# EAGLE board SAME54-board-1.0.3 (EAGLE 9.6.2)
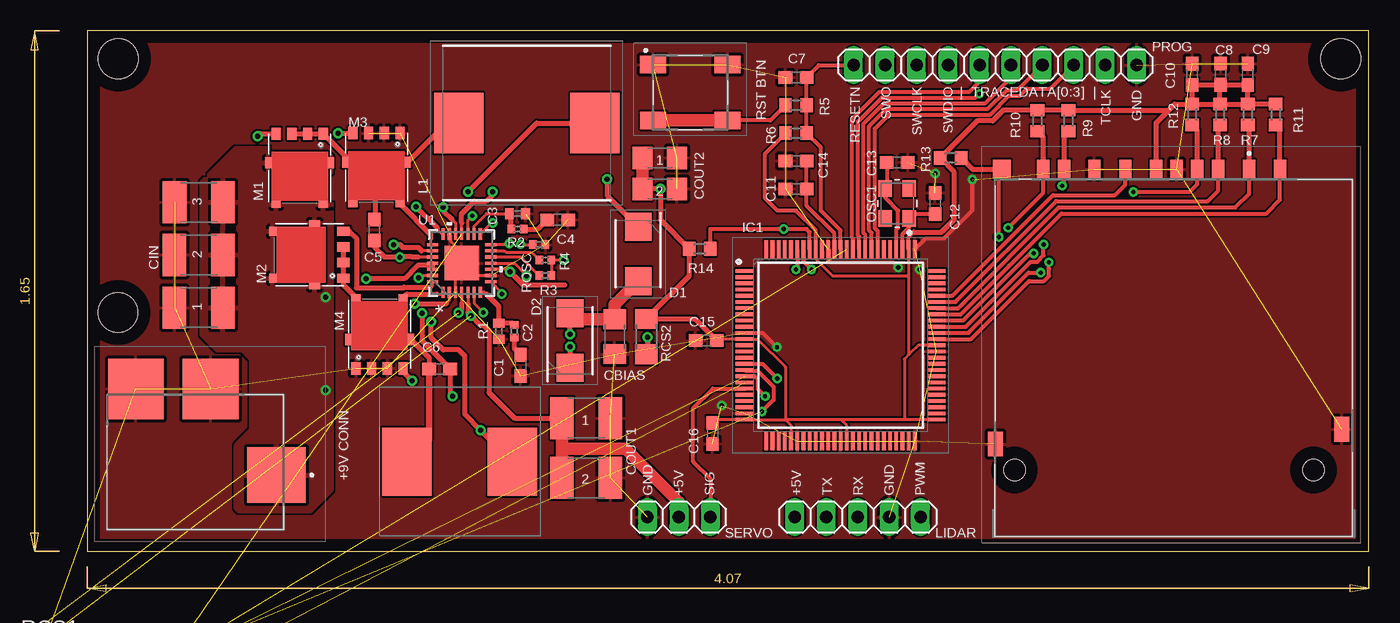
[diagram p0: board, top side]
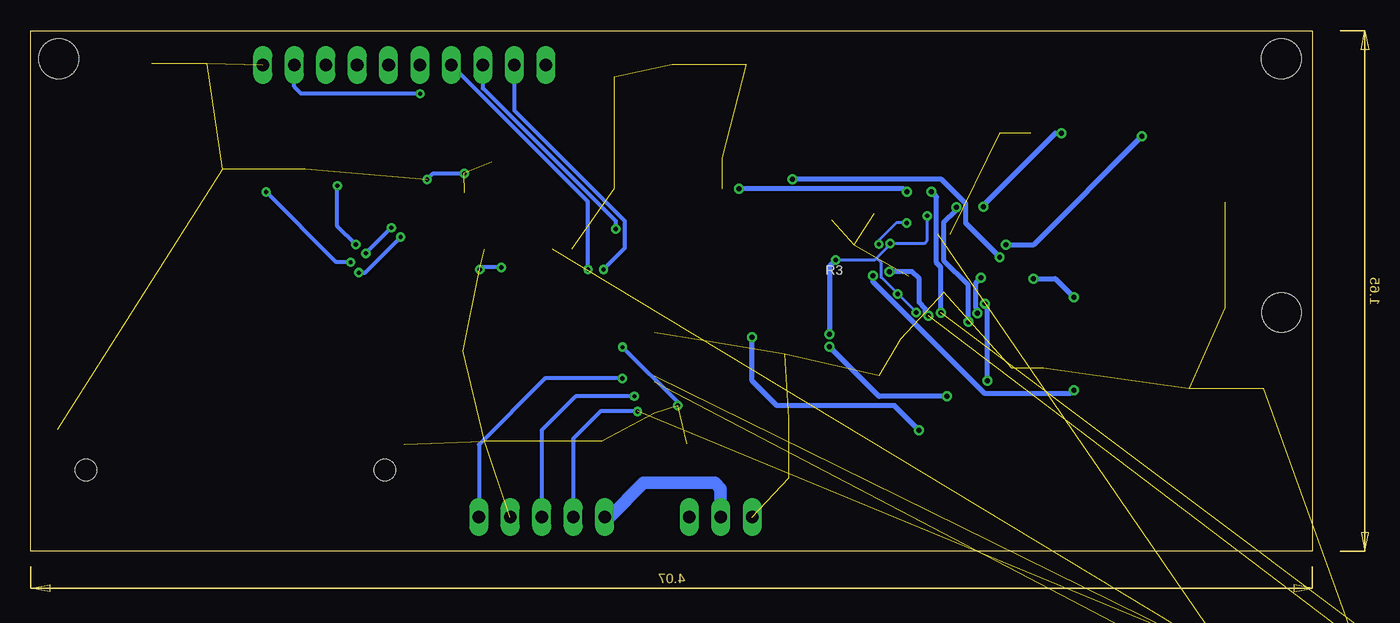
[diagram p1: board, bottom side, seen from below]

Size 103.5 x 42 mm. Coordinates in mm from the lower left corner, seen from the top.
Outline: 0,0 103.5,0 103.5,42 0,42 0,0
Copper layers (1*16): Top 0.035mm / dielectric 1.5mm / Bottom 0.035mm
Design rules "default": minimum track width 6mil, minimum drill 0.35mm, track to track 6mil, track to pad 6mil, pad to pad 6mil, via to via 6mil, smd to smd 6mil, copper to edge 40mil, drill to drill 6mil, minimum pad ring 10mil, minimum via ring 8mil, stop-mask expansion 4mil, vias tented up to drill 0mil, thermal gap 10mil
Holes 3.2 mm at 2.48,19.27 2.5,39.75 101.25,39.75

## Footprints (pad centres in the part's own frame; a part is rotated, then mirrored left to right if it is on the bottom)
C0603 = smd 1.1 x 1: 1 -0.85,0; 2 0.85,0
C0402 = smd 0.7 x 0.9: 1 -0.65,0; 2 0.65,0
C1206 = smd 1.6 x 1.8: 1 -1.4,0; 2 1.4,0
C1812 = smd 1.9 x 3.4: 1 -1.95,0; 2 1.95,0
DIOM5436X247N = smd 2.25 x 2.15: 1 -2.2,0; 2 2.2,0
QFP50P1600X1600X120-100N = smd 1.475 x 0.3: 1 -7.738,6; 2 -7.738,5.5; 3 -7.738,5; 4 -7.738,4.5; 5 -7.738,4; 6 -7.738,3.5; 7 -7.738,3; 8 -7.738,2.5; 9 -7.738,2; 10 -7.738,1.5; 11 -7.738,1; 12 -7.738,0.5; 13 -7.738,0; 14 -7.738,-0.5; 15 -7.738,-1; 16 -7.738,-1.5; 17 -7.738,-2; 18 -7.738,-2.5; 19 -7.738,-3; 20 -7.738,-3.5; 21 -7.738,-4; 22 -7.738,-4.5; 23 -7.738,-5; 24 -7.738,-5.5; 25 -7.738,-6; 51 7.738,-6; 52 7.738,-5.5; 53 7.738,-5; 54 7.738,-4.5; 55 7.738,-4; 56 7.738,-3.5; 57 7.738,-3; 58 7.738,-2.5; 59 7.738,-2; 60 7.738,-1.5; 61 7.738,-1; 62 7.738,-0.5; 63 7.738,0; 64 7.738,0.5; 65 7.738,1; 66 7.738,1.5; 67 7.738,2; 68 7.738,2.5; 69 7.738,3; 70 7.738,3.5; 71 7.738,4; 72 7.738,4.5; 73 7.738,5; 74 7.738,5.5; 75 7.738,6 | smd 0.3 x 1.475: 26 -6,-7.738; 27 -5.5,-7.738; 28 -5,-7.738; 29 -4.5,-7.738; 30 -4,-7.738; 31 -3.5,-7.738; 32 -3,-7.738; 33 -2.5,-7.738; 34 -2,-7.738; 35 -1.5,-7.738; 36 -1,-7.738; 37 -0.5,-7.738; 38 0,-7.738; 39 0.5,-7.738; 40 1,-7.738; 41 1.5,-7.738; 42 2,-7.738; 43 2.5,-7.738; 44 3,-7.738; 45 3.5,-7.738; 46 4,-7.738; 47 4.5,-7.738; 48 5,-7.738; 49 5.5,-7.738; 50 6,-7.738; 76 6,7.738; 77 5.5,7.738; 78 5,7.738; 79 4.5,7.738; 80 4,7.738; 81 3.5,7.738; 82 3,7.738; 83 2.5,7.738; 84 2,7.738; 85 1.5,7.738; 86 1,7.738; 87 0.5,7.738; 88 0,7.738; 89 -0.5,7.738; 90 -1,7.738; 91 -1.5,7.738; 92 -2,7.738; 93 -2.5,7.738; 94 -3,7.738; 95 -3.5,7.738; 96 -4,7.738; 97 -4.5,7.738; 98 -5,7.738; 99 -5.5,7.738; 100 -6,7.738
PJ070BHSMTTR = smd 4.7 x 4.5: 1 -5.368,2.5 | smd 4.5 x 4.9: 2 -0.067,-4.45; 3 5.982,-4.45
INDPM135125X350N = smd 4 x 4.9: 1 -5.5,0; 2 5.5,0
MSS1260 = smd 5.5 x 4: P$1 0,8.5; P$2 0,0
CHIPLED_0603 = smd 0.8 x 0.8: A 0,-0.75; C 0,0.75
1X05 = drill 1.016 long: 1 -5.08,0; 2 -2.54,0; 3 0,0; 4 2.54,0; 5 5.08,0
DFN5_SO-8FL = smd 0.495 x 0.905: D1 -2.527,2.342; D4 2.527,2.342 | smd 0.75 x 0.575: D2 -1.905,5.707; D3 1.905,5.707 | smd 0.75 x 1: G 1.905,0; S1 -1.905,0; S2 -0.635,0; S3 0.635,0
OSCCC320X250X90N = smd 1.333 x 1.083: 1 -1.2,-0.975; 2 1.2,-0.975; 3 1.2,0.975; 4 -1.2,0.975
1X10 = drill 1.016 long: 1 -11.43,0; 2 -8.89,0; 3 -6.35,0; 4 -3.81,0; 5 -1.27,0; 6 1.27,0; 7 3.81,0; 8 6.35,0; 9 8.89,0; 10 11.43,0
R0402 = smd 0.6 x 0.7: 1 -0.5,0; 2 0.5,0
R0603 = smd 1 x 1.1: 1 -0.85,0; 2 0.85,0
R1206 = smd 1.6 x 1.803: 1 -1.422,0; 2 1.422,0
LL3301BF065QJ = smd 2.1 x 1.4: 1 -3,2.25; 2 3,2.25; 3 -3,-2.25; 4 3,-2.25
GSD09002SEU = smd 1.5 x 1: 1 -14.183,6.3; 2 -14.183,3.8; 3 -14.183,0.45; 4 -14.183,-1.2; 5 -14.183,-3.7; 6 -14.183,-6.2; 7 -14.183,-8.63; 8 -14.183,-10.33; 9 -14.183,8.8; CD1 -14.183,2.1 | smd 2 x 1.2: G1 6.827,13.8; G2 8.027,-14.2 | smd 1.5 x 1.45: WP1 -14.183,-13.68 | hole 1.7: 10.127,11.5; 10.127,-12.65
1X03 = drill 1.016 long: 1 -2.54,0; 2 0,0; 3 2.54,0
21-100130_MXM = smd 0.914 x 0.254: 1 -2.349,1.5; 2 -2.349,1; 3 -2.349,0.5; 4 -2.349,0; 5 -2.349,-0.5; 6 -2.349,-1; 7 -2.349,-1.5; 15 2.349,-1.5; 16 2.349,-1; 17 2.349,-0.5; 18 2.349,0; 19 2.349,0.5; 20 2.349,1; 21 2.349,1.5 | smd 0.254 x 0.914: 8 -1.5,-2.349; 9 -1,-2.349; 10 -0.5,-2.349; 11 0,-2.349; 12 0.5,-2.349; 13 1,-2.349; 14 1.5,-2.349; 22 1.5,2.349; 23 1,2.349; 24 0.5,2.349; 25 0,2.349; 26 -0.5,2.349; 27 -1,2.349; 28 -1.5,2.349 | smd 2.794 x 2.794: 29 0,0

## Placement (x,y rotation side)
C1  4.7n  [C0603]  35,15 270 top
C2  4.7p  [C0402]  33.25,17.75 270 top
C3  4.7p  [C0402]  34.75,27.25 0 top
C4  4.7n  [C0603]  38,26.75 0 top
C5  100n  [C0603]  23.2,25.94 270 top
C6  100n  [C0603]  28.46,14.7 0 top
C7  100n  [C0603]  57.25,38.25 180 top
C8  100n  [C0603]  91.55,38.51 90 top
C9  10u  [C0603]  93.75,38.5 90 top
C10  100n  [C0603]  89.25,38.5 90 top
C11  100n  [C0603]  57.25,29.25 180 top
C12  8p  [C0603]  68.49,28.07 90 top
C13  8p  [C0603]  65.43,31.38 0 top
C14  4.7u  [C0603]  57.25,31.5 180 top
C15  100n  [C0603]  50,17 180 top
C16  100n  [C0603]  50.5,9.5 270 top
CBIAS  6.8u  [C1206]  42.6,17.31 270 top
CIN_1  33u  [C1812]  9.01,28.16 180 top
CIN_2  33u  [C1812]  9,23.91 180 top
CIN_3  33u  [C1812]  9,19.66 180 top
COUT1_1  33u  [C1812]  40.3,10.74 0 top
COUT1_2  33u  [C1812]  40.3,5.91 0 top
COUT2_1  22u  [C1206]  46.25,31.75 0 top
COUT2_2  22u  [C1206]  46.25,29.25 0 top
D1  MBRS140T3G  [DIOM5436X247N]  44.5,24 270 top
D2  MBRS140T3G  [DIOM5436X247N]  39,17 90 top
IC1  ATSAME54N20A-AUT  [QFP50P1600X1600X120-100N]  60.85,16.62 0 top
J1  PJ-070BH-SMT-TR  [PJ070BHSMTTR]  9.91,8.64 180 top
L1  SRP1238A-3R3M  [INDPM135125X350N]  35.5,34.56 0 top
L2  MSS1260-682MLB  [MSS1260]  34.33,7.22 90 top
LED_RX  [CHIPLED_0603]  -16.25,-20.75 0 top  (outside the outline)
LED_STATUS  [CHIPLED_0603]  -11.25,-20.75 0 top  (outside the outline)
LED_TX  [CHIPLED_0603]  -21.25,-20.75 0 top  (outside the outline)
LIDAR  [1X05]  62.24,2.75 0 top
M1  NVMFS5C468NL  [DFN5_SO-8FL]  17.16,33.7 180 top
M2  NVMFS5C468NL  [DFN5_SO-8FL]  20.7,23.93 90 top
M3  NVMFS5C468NL  [DFN5_SO-8FL]  23.36,33.75 180 top
M4  NVMFS5C468NL  [DFN5_SO-8FL]  23.61,14.75 0 top
OSC1  CX3225CA12000D0KPSC1CX3225CA  [OSCCC320X250X90N]  65.43,28.07 90 top
PROG  [1X10]  73.34,39.25 0 top
R1  10.5k  [R0402]  34.5,17.75 90 top
R2  10.2k  [R0402]  34.75,26 180 top
R3  51k  [R0402]  37,22.25 180 top
R4  51k  [R0402]  37,23.5 180 top
R5  330  [R0603]  57.25,36 0 top
R6  10k  [R0603]  57.25,33.75 180 top
R7  100k  [R0603]  93.75,35.25 90 top
R8  10k  [R0603]  91.5,35.25 90 top
R9  100k  [R0603]  79.25,34.75 90 top
R10  100k  [R0603]  76.75,34.75 90 top
R11  100k  [R0603]  96,35.25 90 top
R12  10k  [R0603]  89.25,35.25 90 top
R13  10k  [R0603]  69.75,31.75 180 top
R14  1k  [R0603]  49.47,24.41 180 top
R15  10k  [R0603]  -7.25,-20.25 0 top  (outside the outline)
R16  [R0603]  -22,-25.25 0 top  (outside the outline)
R17  [R0603]  -22,-28.75 0 top  (outside the outline)
R18  [R0603]  -22,-32.25 0 top  (outside the outline)
RCS1  10m  [R0603]  -4.75,-7.5 0 top  (outside the outline)
RCS2  20m  [R1206]  45.15,17.32 90 top
RESET_BTN  LL3301BF065QJ  [LL3301BF065QJ]  48.71,37.03 0 top
ROSC  46.4k  [R0402]  36.5,24.75 180 top
SD_CARD_CONN  GSD09002SEU  [GSD09002SEU]  87.55,16.67 270 top
SERVO  [1X03]  47.79,2.75 180 top
START_BTN  LL3301BF065QJ  [LL3301BF065QJ]  -1.5,-14 0 top  (outside the outline)
U1  MAX20034ATIS/VY+  [21-100130_MXM]  30.25,23.25 90 top

## Library data of the parts
C1-C16 CBIAS CIN_1-CIN_3 COUT1_1 COUT1_2 COUT2_1 COUT2_2 = rcl; SPICEPREFIX: C
D1 D2 = LAMS_lib; DESCRIPTION: ON SEMICONDUCTOR - MBRS140T3G - Schottky Rectifier, 40 V, 1 A, Single, DO-214AA (SMB), 2 Pins, 600 mV; HEIGHT: 2.47mm; MANUFACTURER_NAME: ON Semiconductor; MANUFACTURER_PART_NUMBER: MBRS140T3G; MOUSER_PART_NUMBER: 863-MBRS140T3G; MOUSER_PRICE-STOCK: https://www.mouser.co.uk/ProductDetail/ON-Semiconductor/MBRS140T3G?qs=3JMERSakebr7iYT6dCJz%252BA%3D%3D
IC1 = LAMS_lib; DESCRIPTION: ARM Microcontrollers - MCU 120MHZ 1024KB FLASH 100 TQFP PKG IN 85C; HEIGHT: 1.2mm; MANUFACTURER_NAME: Microchip; MANUFACTURER_PART_NUMBER: ATSAME54N20A-AUT; MOUSER_PART_NUMBER: 556-ATSAME54N20AAUT; MOUSER_PRICE-STOCK: https://www.mouser.co.uk/ProductDetail/Microchip-Technology/ATSAME54N20A-AUT?qs=HXFqYaX1Q2wziE5NRG3J9w%3D%3D
J1 = LAMS_lib; DESCRIPTION: DC Power Connectors powerjack, 2.5x5.5mm, vertical, SMT, highcurrent, 1switch, T/Rpackaging; HEIGHT: 14mm; MANUFACTURER_NAME: CUI Devices; MANUFACTURER_PART_NUMBER: PJ-070BH-SMT-TR; MOUSER_PART_NUMBER: 490-PJ-070BH-SMT-TR; MOUSER_PRICE-STOCK: https://www.mouser.co.uk/ProductDetail/CUI-Devices/PJ-070BH-SMT-TR?qs=WyjlAZoYn52QG%252BaAz33LnQ%3D%3D
L1 = LAMS_lib; DESCRIPTION: Bourns SRP1238A Series Shielded Wire-wound SMD Inductor with a Carbonyl Powder Core, 3.3 uH +/-20% 12A Idc; HEIGHT: 3.5mm; MANUFACTURER_NAME: Bourns; MANUFACTURER_PART_NUMBER: SRP1238A-3R3M; MOUSER_PART_NUMBER: 652-SRP1238A-3R3M; MOUSER_PRICE-STOCK: https://www.mouser.co.uk/ProductDetail/Bourns/SRP1238A-3R3M?qs=7z%252BmIopC6%2FIr03myiJYD%2FQ%3D%3D
L2 M1-M4 OSC1 = LAMS_lib
LED_RX LED_STATUS LED_TX = led
LIDAR PROG SERVO = pinhead
R1-R18 RCS1 RCS2 ROSC = rcl; SPICEPREFIX: R
RESET_BTN START_BTN = LAMS_lib; DESCRIPTION: Pushbutton Switches 50mA 12VDC F065 9.5mm J-Lead; HEIGHT: 9.8mm; MANUFACTURER_NAME: E-Switch; MANUFACTURER_PART_NUMBER: LL3301BF065QJ; MOUSER_PART_NUMBER: 612-LL3301BF065QJ; MOUSER_PRICE-STOCK: https://www.mouser.co.uk/ProductDetail/E-Switch/LL3301BF065QJ?qs=QtyuwXswaQgf5j8qoJZz7w%3D%3D
SD_CARD_CONN = LAMS_lib; DESCRIPTION: Memory Card Connectors SD, 9 pos, 15U; HEIGHT: 2.75mm; MANUFACTURER_NAME: Amphenol; MANUFACTURER_PART_NUMBER: GSD09002SEU; MOUSER_PART_NUMBER: 523-GSD09002SEU; MOUSER_PRICE-STOCK: https://www.mouser.co.uk/ProductDetail/Amphenol-Commercial-Products/GSD09002SEU?qs=J%2Fw1naXNy4LtG6w9y13mdQ%3D%3D
U1 = LAMS_lib; MANUFACTURER_PART_NUMBER: MAX20034ATISVY+; VENDOR: Maxim Integrated Products

## Nets
+3V3: C8.1 C9.1 C10.1 C15.1 C16.1 COUT2_1.1 COUT2_2.1 IC1.12 IC1.25 IC1.30 IC1.39 IC1.51 IC1.63 IC1.77 IC1.92 R6.2 R7.2 R8.2 R9.2 R10.2 R11.2 R12.2 R13.2 R14.2 R17.2 R18.2 RCS2.2 SD_CARD_CONN.4 START_BTN.3 START_BTN.4 U1.18
+5V: COUT1_1.1 COUT1_2.1 LIDAR.1 RCS1.2 SERVO.2 U1.5 U1.10
+9V: CIN_1.1 CIN_2.1 CIN_3.1 J1.1 M1.D1 M1.D2 M1.D3 M1.D4 M2.D1 M2.D2 M2.D3 M2.D4 U1.11 U1.25 U1.26
BIAS: CBIAS.1 D1.2 D2.2 R3.1 R4.1 U1.6 U1.8 U1.14 U1.17
BST1: C6.2 D2.1 U1.27
BST2: C5.2 D1.1 U1.24
COMP1: C2.1 R1.2 U1.7
COMP2: C3.1 R2.2 U1.16
CS1: L1.2 RCS1.1 U1.4
CS2: L2.P$2 RCS2.1 U1.19
DH1: M2.G U1.28
DH2: M1.G U1.23
DL1: M4.G U1.2
DL2: M3.G U1.21
FOSC: ROSC.2 U1.15
GND: C1.2 C2.2 C3.2 C4.2 C7.2 C8.2 C9.2 C10.2 C11.2 C12.2 C13.2 C14.2 C15.2 C16.2 CBIAS.2 CIN_1.2 CIN_2.2 CIN_3.2 COUT1_1.2 COUT1_2.2 COUT2_1.2 COUT2_2.2 IC1.11 IC1.24 IC1.31 IC1.38 IC1.50 IC1.62 IC1.76 IC1.90 J1.2 J1.3 LED_STATUS.C LIDAR.4 M3.S1 M3.S2 M3.S3 M4.S1 M4.S2 M4.S3 PROG.10 R15.1 RESET_BTN.1 RESET_BTN.2 ROSC.1 SD_CARD_CONN.3 SD_CARD_CONN.6 SD_CARD_CONN.G1 SD_CARD_CONN.G2 SERVO.3 U1.3 U1.9 U1.20 U1.29
LED_STATUS: IC1.19 R16.2
LIDAR_PWM: IC1.16 LIDAR.5
LIDAR_RX: IC1.18 LED_RX.C LIDAR.3
LIDAR_TX: IC1.17 LED_TX.C LIDAR.2
LX1: C6.1 L2.P$1 M2.S1 M2.S2 M2.S3 M4.D1 M4.D2 M4.D3 M4.D4 U1.1
LX2: C5.1 L1.1 M1.S1 M1.S2 M1.S3 M3.D1 M3.D2 M3.D3 M3.D4 U1.22
N$1: C1.1 R1.1
N$2: LED_STATUS.A R16.1
N$3: C4.1 R2.1
N$4: R5.1 RESET_BTN.3 RESET_BTN.4
N$8: LED_RX.A R17.1
N$9: LED_TX.A R18.1
PGOOD1: R3.2 U1.12
PGOOD2: R4.2 U1.13
RESETN: C7.1 IC1.88 PROG.1 R5.2 R6.1
SDCD: IC1.64 R12.1 SD_CARD_CONN.CD1
SDCK: IC1.71 SD_CARD_CONN.5
SDCMD: IC1.70 R8.1 SD_CARD_CONN.2
SDDAT0: IC1.66 R9.1 SD_CARD_CONN.7
SDDAT1: IC1.67 R10.1 SD_CARD_CONN.8
SDDAT2: IC1.68 R11.1 SD_CARD_CONN.9
SDDAT3: IC1.69 R7.1 SD_CARD_CONN.1
SDWP: IC1.65 R13.1 SD_CARD_CONN.WP1
SERVO_PWM: IC1.20 SERVO.1
START_BTN: IC1.87 R15.2 START_BTN.1 START_BTN.2
SWDCLK: IC1.93 PROG.3 R14.1
SWDIO: IC1.94 PROG.4
SWO: IC1.95 PROG.2
TRACECLK: IC1.85 PROG.9
TRACEDATA[0]: IC1.86 PROG.5
TRACEDATA[1]: IC1.84 PROG.6
TRACEDATA[2]: IC1.83 PROG.7
TRACEDATA[3]: IC1.82 PROG.8
VDDCORE: C11.1 C14.1 IC1.89
XIN1: C12.1 IC1.78 OSC1.1
XOUT1: C13.1 IC1.79 OSC1.3

## Tracks (layer width: path | path; a pad name or v marks a point on that pad's centre or on a via)
+3V3  (via drill 0.4 pad 0.8)  (4 unrouted)
  Top 0.254: U1.18 30.25,26.5 | C16.1 50.77,10.62 IC1.25 56.38,10.62 | C15.1 50.97,17.12 IC1.12 54.13,17.12 56.38,14.87 56.38,10.62 | IC1.30 56.85,10.15 56.38,10.62 | IC1.39 61.35,10.15 60.88,10.62 | 60.88,10.62 56.38,10.62 | IC1.51 66,10.62 | 66,10.62 60.88,10.62 | IC1.63 67.12,16.62 66.38,15.88 | 66,10.62 66,15.5 66.38,15.88 | IC1.77 66.35,22.25 | 66.35,22.25 66.35,15.9 66.38,15.88 | 66.35,22.25 60.17,22.25 58.85,23.57 IC1.92
  Top 0.305: IC1.92 58.85,25.9 57.25,27.5 55.75,27.5 54.75,28.5 54.75,32.1 R6.2 | IC1.77 66.35,25.35 66.75,25.75
  Top 0.406: 30.25,26.5 30.25,27.25 31.25,28.25 32.25,28.25 32.75,28.75 v32.75,29 | COUT2_2.1 v46.29,29.25 46.29,26.74 R14.2 48.62,22.21 RCS2.2 49.11,18.74 C15.1 | R12.2 R8.2 | R8.2 R7.2 | R11.2 R7.2 | R7.2 C9.1 C8.1 91.5,37.61 | R8.2 91.5,37.61 | R12.2 C10.1 91.46,37.65 91.5,37.61 | SD_CARD_CONN.4 86.35,34.6 87.35,35.6 | R12.2 87.85,36.1 87.35,35.6 | 87.35,35.6 R9.2 R10.2 74.01,35.6 73.15,34.74 71.89,34.74 R13.2 70,30.65 70,26.75 69,25.75 66.75,25.75
  Top 1.016: COUT2_2.1 COUT2_1.1
  Bottom 0.406: v32.75,29 33,29.25 v46.29,29.25
+5V  (via drill 0.4 pad 0.8)  (1 unrouted)
  Top 0.254: U1.5 30.75,20 | v34.13,22.57 33.95,22.75 U1.10
  Top 0.406: 30.75,20 30.75,19.25 v31,19 31.75,18.25 32,18.25 32.44,17.81 32.44,12.81 34.51,10.74 COUT1_1.1 | v34.13,22.57 34.74,21.96 34.74,21.94 35.19,21.49 38.57,21.49
  Top 1.016: COUT1_2.1 38.35,8.25 | 38.35,8.25 COUT1_1.1 | SERVO.2 47.79,3.96 43.48,8.27 41.03,8.27 41.01,8.25 38.35,8.25
  Bottom 0.406: v31,19 31.25,19.25 31.25,19.57 31.75,20.08 31.75,22 32.32,22.57 v34.13,22.57
  Bottom 1.016: SERVO.2 47.79,5.04 48.25,5.5 54,5.5 56.75,2.75 LIDAR.1
+9V  (via drill 0.4 pad 0.8)
  Top 0.254: v35.5,22.25 34.5,23.25 U1.11
  Top 0.305: U1.26 27.9,23.08 U1.25
  Top 0.406: M1.D2 19.07,30.73 M1.D1 | v22.51,22.01 25.62,22.01 26.69,23.08 27.9,23.08
  Bottom 0.406: v22.51,22.01 20.76,22.01 v19.25,20.5 | v35.5,22.25 35.5,21.75 26.5,12.75 19.5,12.75 v19.25,13
  pour Top: 9.25,29.75 9.25,17.5 10.5,16.25 12.5,16.25 13.25,15.5 13.25,9.75 12,8.5 12,3.5 12.25,3.25 18,3.25 19.75,5 19.75,31.75 19,32.5 12,32.5
BIAS  (via drill 0.35 pad 0.5, 0.4 pad 0.8)
  Top 0.254: U1.17 30.75,26.71 v31.11,27.07 | v34.09,24.84 34,24.75 U1.14 | v38.5,23.5 R4.1 R3.1 | U1.8 33.48,20.87 v33.48,20.77 | U1.6 31.25,20 v31.98,19.27
  Top 0.406: v39,17.5 D2.2
  Top 1.016: D2.2 39.49,18.71 CBIAS.1 42.6,19.9 D1.2
  Bottom 0.254: v31.11,27.07 31.11,25.06 31.34,24.84 v34.09,24.84 34.34,24.58 34.34,24.51 35.19,23.66 | v31.98,19.27 v33.48,20.77 34.82,22.11 34.82,23.28 35.19,23.66 | 35.19,23.66 35.35,23.5 v38.5,23.5
  Bottom 0.406: v38.5,23.5 39,23 v39,17.5
BST1  (via drill 0.4 pad 0.8)
  Top 0.254: U1.27 26.93,22.25 v26.75,22.07
  Top 0.406: v27.03,19.22 27.03,16.99 C6.2 29.31,12.69 v29.5,12.5 | v39,16.5 D2.1
  Bottom 0.406: v27.03,19.22 27.03,19.5 27.2,19.68 27.2,21.61 v26.75,22.07 | v39,16.5 35,12.5 v29.5,12.5
BST2  (via drill 0.4 pad 0.8)
  Top 0.254: 26.75,23.75 U1.24
  Top 0.406: C5.2 23.2,24.55 24,23.75 v25.26,23.75 | 26.75,23.75 26.25,23.75 v25.26,23.75 | v25.26,23.75 v25.25,23.74 | v42,30.01 42,28.7 D1.1
  Bottom 0.406: v25.25,23.74 27.99,26.48 27.99,28.06 29.94,30.01 v42,30.01
COMP1
  Top 0.254: 32.25,20.75 32.1,20.9 U1.7
  Top 0.406: R1.2 34.35,18.4 C2.1 33.25,19.75 32.25,20.75
COMP2
  Top 0.254: U1.16 31.25,26.25 32.25,27.25 C3.1
  Top 0.406: R2.2 34.25,27.1 C3.1
CS1  (via drill 0.4 pad 0.8)  (1 unrouted)
  Top 0.254: U1.4 30.25,20
  Top 0.406: 30.25,20 30.25,19.5 v30,19.25 | v30.75,29 36.31,34.56 L1.2
  Top 1.016: 40.85,34.41 L1.2
  Bottom 0.406: v30,19.25 30,22.92 30.35,23.27 30.35,28.6 v30.75,29
CS2  (via drill 0.4 pad 0.8)
  Top 0.254: 29.5,26.75 29.75,26.5 U1.19
  Top 0.406: v27.79,18.5 27.79,17.21 28.75,16.25 30,16.25 30.5,15.75 30.5,11.05 v31.77,9.78 L2.P$2 | v28.75,27.75 28.75,27.5 29.5,26.75 | v45.25,17.25 45.25,16 RCS2.1
  Bottom 0.406: v27.79,18.5 27.79,21.5 29.79,23.5 29.79,26.54 28.75,27.58 v28.75,27.75 | v31.77,9.78 33.77,11.78 43.27,11.78 45.25,13.75 v45.25,17.25
DH1
  Top 0.254: 27.75,21.31 27.9,21.46 U1.28
  Top 0.406: M2.G 21.16,25.84 21.75,25.25 21.75,21.25 25.52,21.25 25.58,21.31 27.75,21.31
DH2  (via drill 0.4 pad 0.8)
  Top 0.254: U1.23 27,24.25
  Top 0.406: 27,24.25 26.75,24.5 25.5,24.5 25.25,24.75 v24.75,24.75 | v13.75,33.5 13.95,33.7 M1.G
  Bottom 0.406: v24.75,24.75 22.5,24.75 v13.75,33.5
DL1  (via drill 0.4 pad 0.8)
  Top 0.254: 29,20 29.25,20.25 U1.2
  Top 0.406: M4.G 25.52,14.48 v26.25,13.75 | v26.45,19.99 28.99,19.99 29,20
  Bottom 0.406: v26.25,13.75 26.25,19.8 v26.45,19.99
DL2  (via drill 0.4 pad 0.8)
  Top 0.254: 28.25,26 28.65,25.6 U1.21
  Top 0.406: v20.25,33.75 M3.G | v26.57,27.82 28.25,26.13 28.25,26
  Bottom 0.406: v26.57,27.82 26.43,27.95 26.43,28.07 20.75,33.75 v20.25,33.75
FOSC  (via drill 0.35 pad 0.5)
  Top 0.254: U1.15 32.65,26.5 v32.75,26.5 | v35,24.78 35.03,24.75 ROSC.2
  Bottom 0.254: v35,24.78 v34.99,24.79 34.99,25.11 33.6,26.5 v32.75,26.5
GND  (via drill 0.35 pad 0.6)  (50 unrouted)
  Top 0.254: U1.3 29.75,22.75 U1.29 | U1.9 31.25,22.25 U1.29 | U1.20 29.34,25.51 29.34,25.03 30.25,24.12 U1.29
  Top 0.305: IC1.76 67.73,25.24 69.21,25.24 71.5,27.53 v71.5,30 | v65.5,22.91 65.09,23.32 60.07,23.32 59.89,23.5 59.89,24.32 IC1.90 | IC1.11 54.56,17.62 v55.72,16.46
  Bottom 0.305: v71.5,30 71,30.5 v68.5,30.5 | v65.5,22.91 67.09,22.91 v67.25,22.75 | v55.72,16.46 51.25,12 v51.25,11.75
  pour Top (rank 6): 0.25,42.25 103.75,42.25 103.75,0.25 -0.25,0.25 -0.25,41.75
LED_STATUS  (1 unrouted)
LIDAR_PWM  (via drill 0.35 pad 0.6)
  Top 0.305: IC1.16 54.54,15.12 v55.72,13.94
  Bottom 0.305: v55.72,13.94 61.97,13.94 67.32,8.59 LIDAR.5
LIDAR_RX  (via drill 0.35 pad 0.6)  (1 unrouted)
  Top 0.305: v54.75,12.5 54.15,13.1 54.15,13.9 53.93,14.12 IC1.18
  Bottom 0.305: v54.75,12.5 59.5,12.5 62.24,9.76 LIDAR.3
LIDAR_TX  (via drill 0.35 pad 0.6)  (1 unrouted)
  Top 0.305: IC1.17 53.16,14.58 54.12,14.58 55.43,13.26 55.43,12.22 v54.5,11.28
  Bottom 0.305: v54.5,11.28 57.5,11.28 59.7,9.08 LIDAR.2
LX1
  Top 0.254: 28.25,20.75 28.6,20.75 U1.1
  Top 0.406: M2.S3 M2.S2 M2.S1 20.7,21.46 M4.D2 21.7,18.5 | M4.D1 21.7,17.71 21.7,18.5 | 25.52,18.5 M4.D3 25.81,20.75 28.25,20.75 | 25.52,18.5 25.52,17.71 M4.D4 27.61,15.62 C6.1 | 25.52,18.5 21.7,18.5
  Top 0.508: C6.1 27.61,9 L2.P$1
LX2
  Top 0.254: 27.75,25.25 27.75,24.9 U1.22
  Top 0.406: M1.S3 M1.S2 M1.S1 20.83,31.93 M3.D4 21.45,30.79 21.45,29.75 | 23.32,26.91 C5.1 23.25,26.84 23.25,29.75 | 27.75,25.25 27.75,25.56 M3.D2 25.27,29.75 | M3.D3 21.45,29.75 | 25.27,29.75 25.27,30.79 M3.D1 29.04,34.56 L1.1 | 21.45,29.75 23.25,29.75 | 23.25,29.75 25.27,29.75
N$1
  Top 0.406: C1.1 34.5,16.35 R1.1
N$2  (1 unrouted)
N$3
  Top 0.406: R2.1 36.4,26 C4.1
N$4
  Top 0.305: R5.1 55.18,34.78 RESET_BTN.4
  Top 1.016: RESET_BTN.3 RESET_BTN.4
N$8  (1 unrouted)
N$9  (1 unrouted)
PGOOD1
  Top 0.254: U1.12 32.63,23.71 35.04,23.71 R3.2
PGOOD2
  Top 0.254: U1.13 33.7,24.25 33.83,24.12 35.88,24.12 R4.2
RESETN
  Top 0.254: 58.29,34.2 R6.1
  Top 0.305: IC1.88 60.85,25.9 59.25,27.5 59.25,32.6 R6.1 R5.2 C7.1 59.1,39.25 PROG.1
SDCD  (via drill 0.35 pad 0.6)
  Top 0.305: IC1.64 71.39,17.12 76.06,21.8 77.28,21.8 77.68,22.2 77.68,22.76 77.67,22.77 v77.67,23.33 | SD_CARD_CONN.CD1 89.65,29.6 89.06,29.01 89.06,29 v84.5,29
  Top 0.406: SD_CARD_CONN.CD1 89.65,34 R12.1
  Bottom 0.305: v77.67,23.33 78.83,23.33 v84.5,29
SDCK
  Top 0.305: IC1.71 69.87,20.62 78,28.75 83,28.75 83.85,29.6 SD_CARD_CONN.5
SDCMD
  Top 0.305: IC1.70 70.14,20.12 78.28,28.26 90.5,28.26 91.35,29.11 SD_CARD_CONN.2
  Top 0.406: SD_CARD_CONN.2 91.35,34.25 R8.1
SDDAT0  (via drill 0.35 pad 0.6)
  Top 0.305: IC1.66 70.97,18.12 76.21,23.36 76.74,23.36 77.25,23.87 v77.25,24.75 | v78.75,29.5 78.92,29.67 SD_CARD_CONN.7
  Top 0.406: SD_CARD_CONN.7 78.92,33.57 R9.1
  Bottom 0.305: v77.25,24.75 78.75,26.25 v78.75,29.5
SDDAT1  (via drill 0.35 pad 0.6)
  Top 0.305: IC1.67 70.76,18.62 76.19,24.04 v76.46,24.04 | v74.39,26.11 77.22,28.94 SD_CARD_CONN.8
  Top 0.406: SD_CARD_CONN.8 77.22,33.43 R10.1
  Bottom 0.305: v76.46,24.04 v74.39,26.11
SDDAT2
  Top 0.305: IC1.68 70.56,19.12 74.48,23.04 74.49,23.04 78.7,27.25 95.25,27.25 96.35,28.35 SD_CARD_CONN.9
  Top 0.406: SD_CARD_CONN.9 96.35,34.05 R11.1
SDDAT3
  Top 0.305: IC1.69 70.35,19.62 78.48,27.75 92.75,27.75 93.85,28.85 SD_CARD_CONN.1
  Top 0.406: SD_CARD_CONN.1 93.85,34.3 R7.1
SDWP  (via drill 0.35 pad 0.6)
  Top 0.305: IC1.65 71.18,17.62 76.04,22.48 v77,22.48 | v73.64,25.36 73.64,30.62 SD_CARD_CONN.WP1
  Top 0.406: R13.1 71.5,30.85 SD_CARD_CONN.WP1
  Bottom 0.305: v77,22.48 76.52,22.48 v73.64,25.36
SERVO_PWM
  Top 0.305: SERVO.1 50.33,5.84 48.95,7.22 48.95,11.53 50.54,13.12 IC1.20
START_BTN  (3 unrouted)
SWDCLK  (via drill 0.35 pad 0.6)
  Top 0.305: IC1.93 58.35,25.75 58.1,26 v56.25,26 50.32,26 R14.1
  Bottom 0.305: v56.25,26 56.25,26.62 66.99,37.36 PROG.3
SWDIO  (via drill 0.35 pad 0.6)
  Top 0.305: IC1.94 57.85,23.4 v58.5,22.75
  Bottom 0.305: v58.5,22.75 58.5,28.22 PROG.4
SWO  (via drill 0.35 pad 0.6)
  Top 0.305: v57.25,22.75 57.37,22.87 57.35,22.9 IC1.95
  Bottom 0.305: PROG.2 64.45,35.57 55.54,26.66 55.54,24.46 v57.25,22.75
TRACECLK  (via drill 0.35 pad 0.6)
  Top 0.305: IC1.85 62.35,25.4 62.24,25.51 62.24,34.68 64.18,36.62 71.76,36.62 v72.07,36.93
  Bottom 0.305: v72.07,36.93 81.66,36.93 82.23,37.5 PROG.9
TRACEDATA[0]
  Top 0.305: IC1.86 61.85,25.25 61.78,25.32 61.78,34.87 63.99,37.08 71.25,37.08 72.07,37.9 PROG.5
TRACEDATA[1]
  Top 0.305: IC1.84 62.85,25.54 62.69,25.7 62.69,34.49 64.37,36.16 72.56,36.16 74.61,38.22 PROG.6
TRACEDATA[2]
  Top 0.305: IC1.83 63.35,25.69 63.15,25.89 63.15,34.3 64.56,35.71 72.75,35.71 74.27,37.23 75.13,37.23 PROG.7
TRACEDATA[3]
  Top 0.305: IC1.82 63.85,25.84 63.61,26.08 63.61,34.11 64.75,35.25 72.94,35.25 74.46,36.77 75.32,36.77 75.9,37.35 77.79,37.35 PROG.8
VDDCORE
  Top 0.254: C11.1 58.25,29.28
  Top 0.305: IC1.89 60.35,25.65 58.1,27.9 C11.1 C14.1
XIN1
  Top 0.305: IC1.78 65.85,25.6 66.41,26.16 OSC1.1 66.75,27.22 C12.1
XOUT1
  Top 0.305: C13.1 64.58,29.39 OSC1.3 64.45,28.55 65.5,27.5 65.5,26.08 65.35,25.93 IC1.79

## Text on the board
tPlace: PROG | RST BTN | RESETN | SWO | SWCLK | SWDIO | | TRACEDATA[0:3] | | TCLK | GND | 1 | COUT2 | L1 | 2 | 3 | IC1 | 2 | CIN | R3 | 1 | D1 | 1 | COUT1 | +9V CONN | 2 | GND | +5V | SIG | +5V | TX | RX | GND | PWM | SERVO | LIDAR